# EAGLE board PCB_2D_Final (EAGLE 9.7.0)
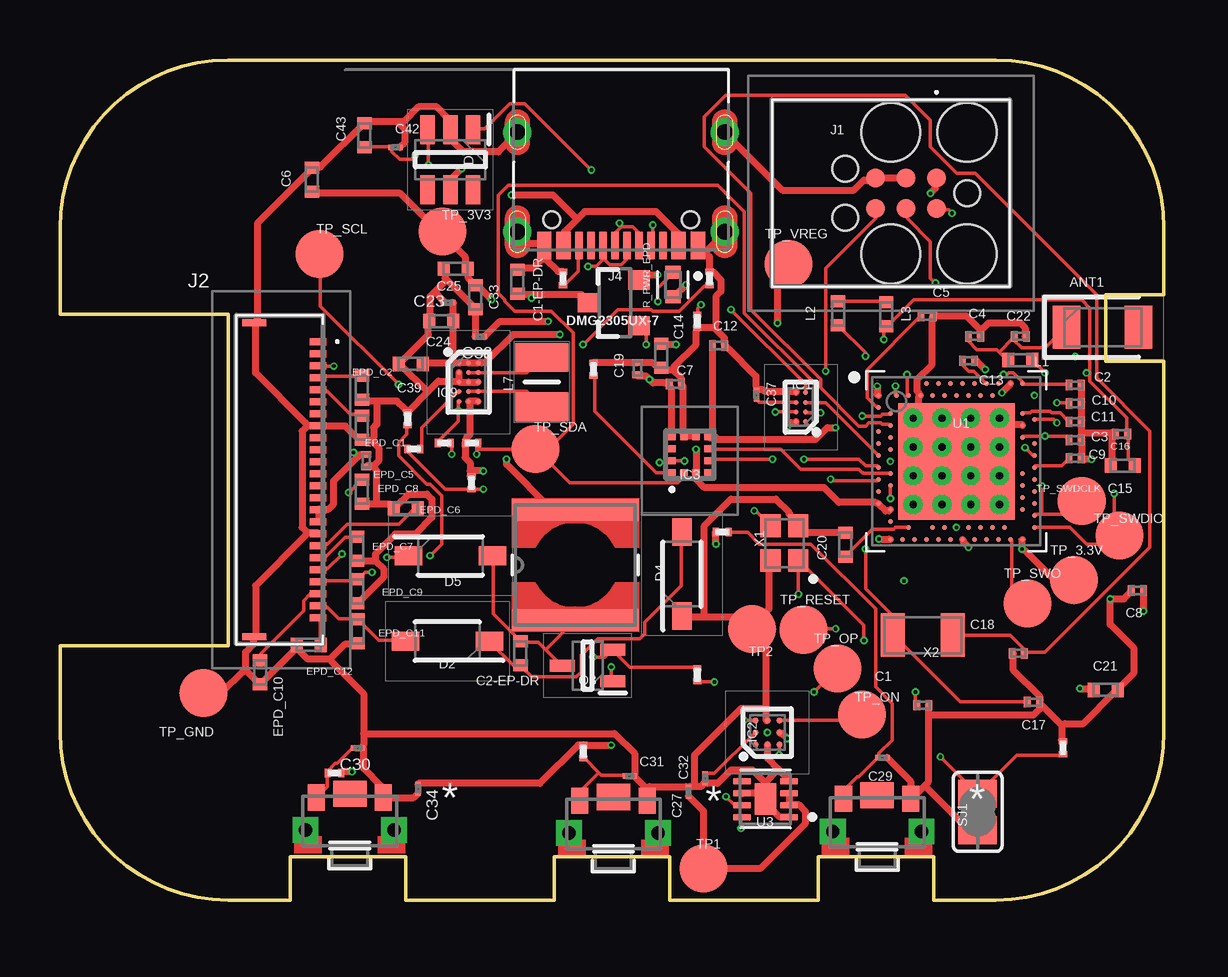
[diagram p0: board, top side]
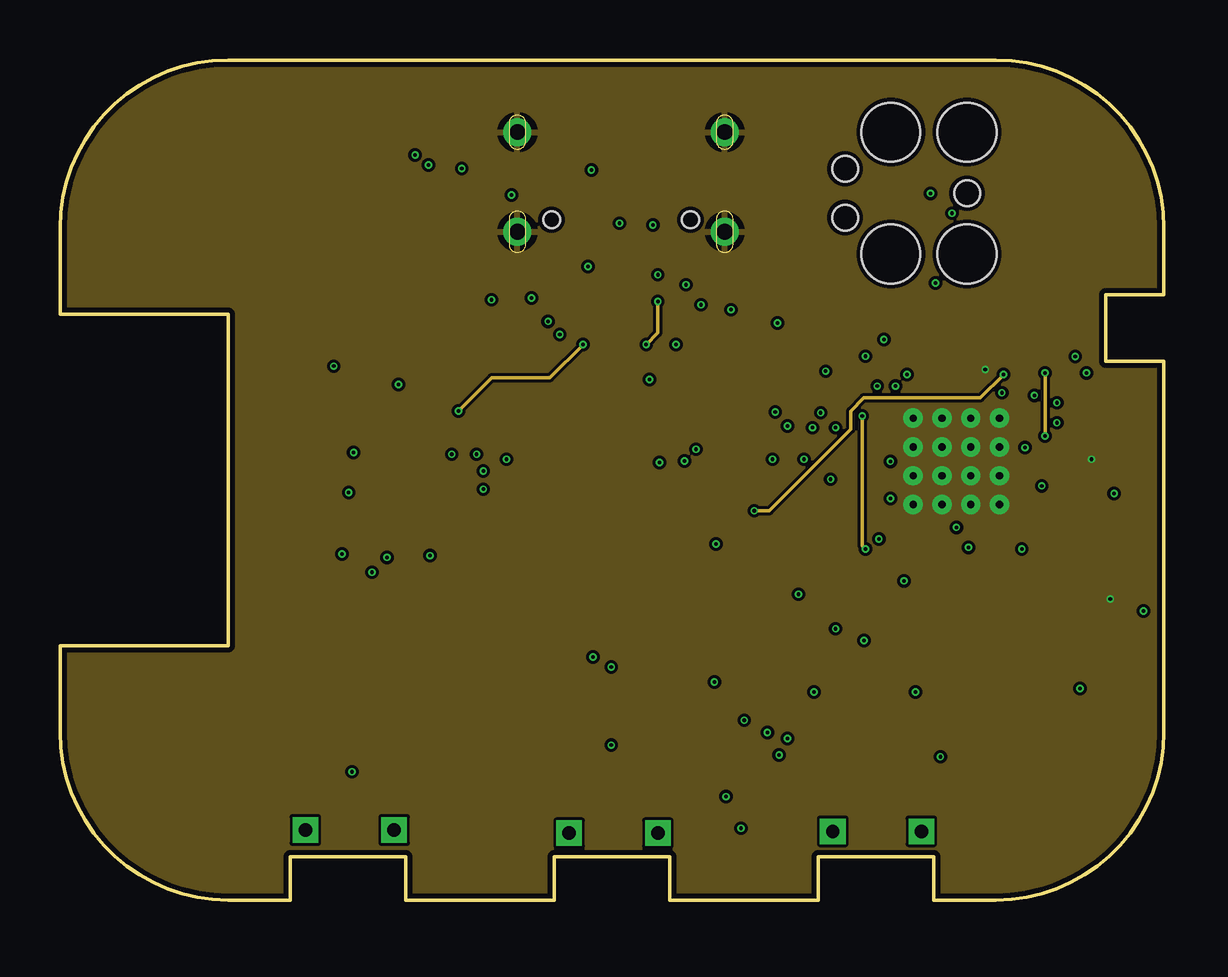
[diagram p1: board, inner layer Route2]
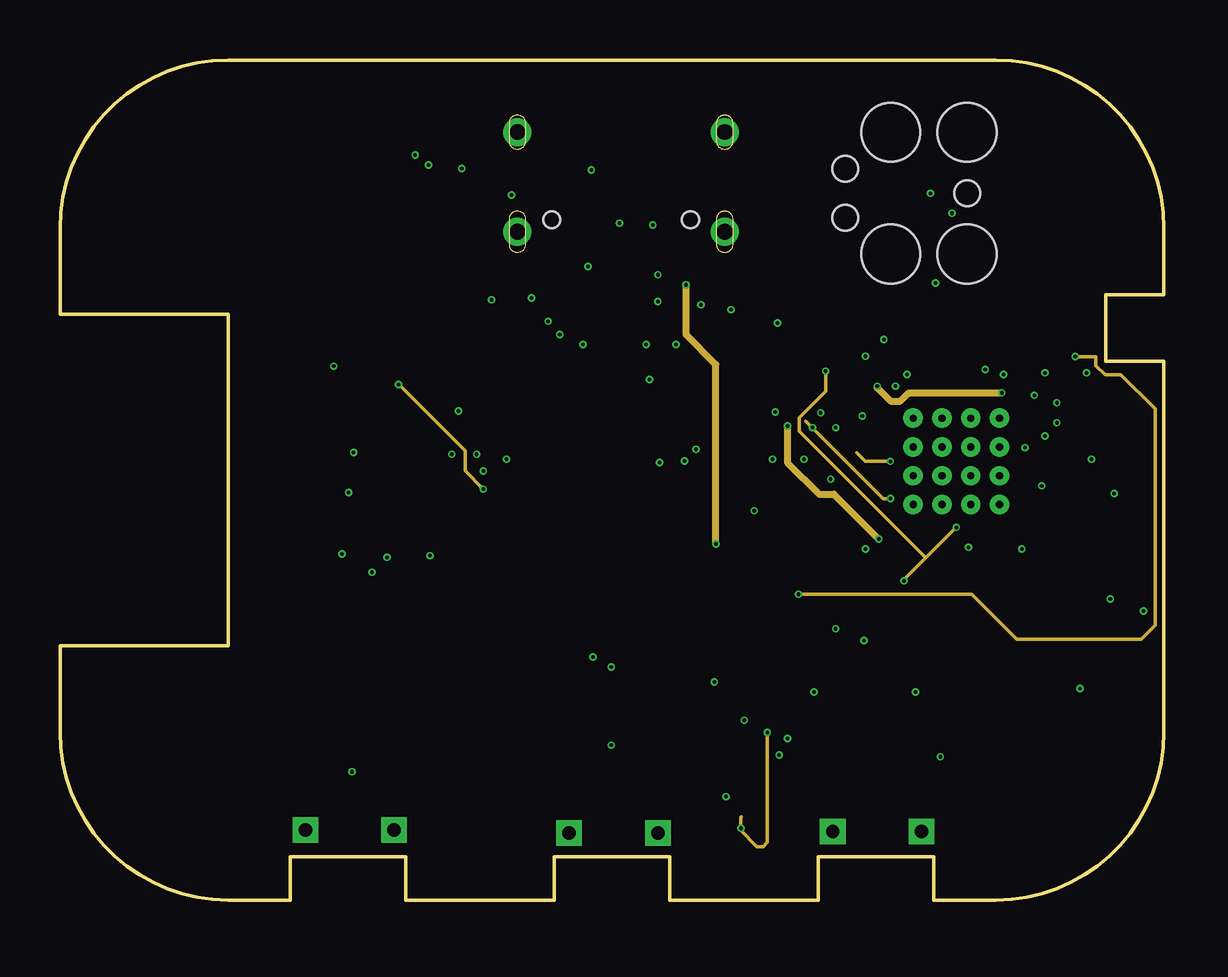
[diagram p2: board, inner layer Route15]
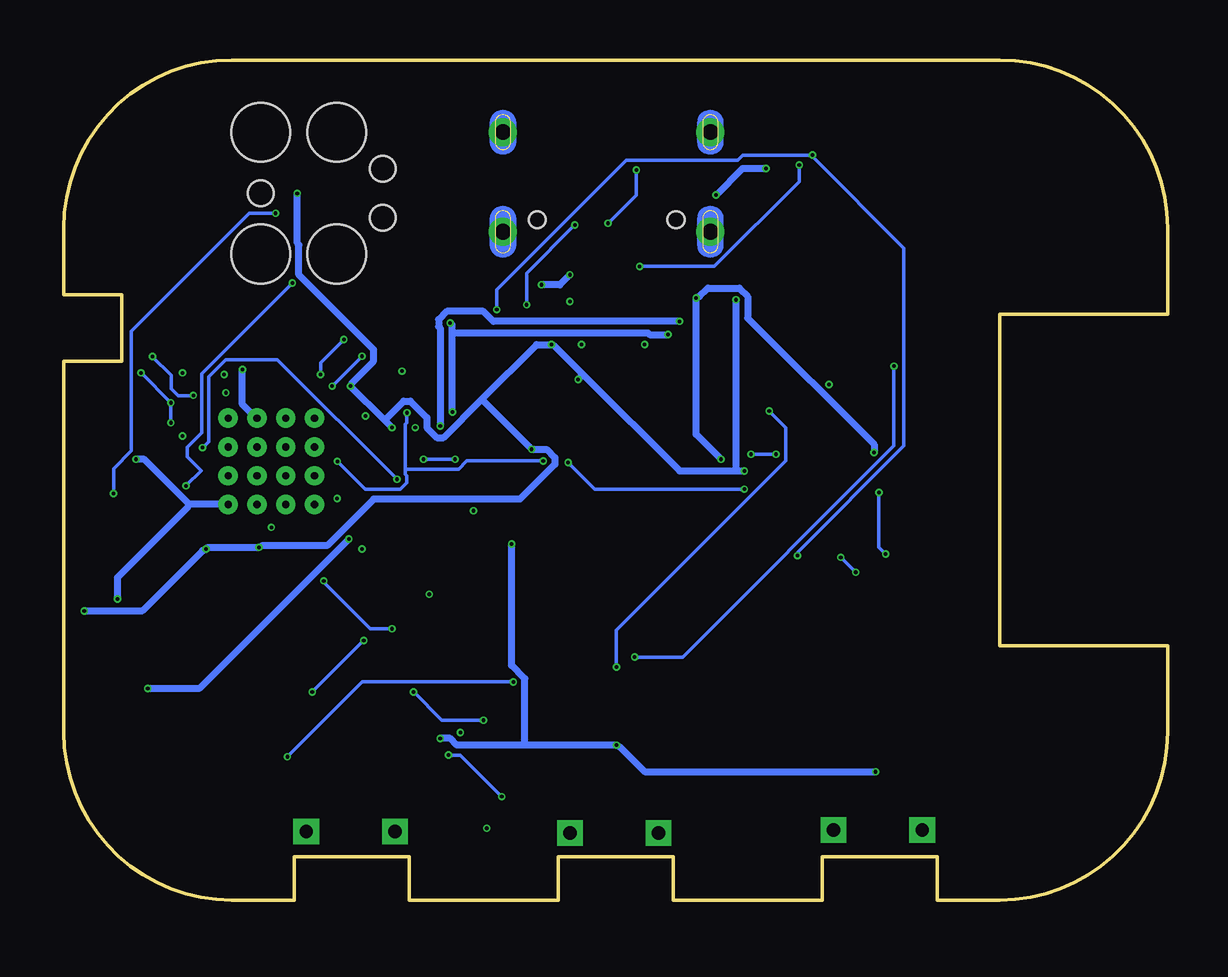
[diagram p3: board, bottom side, seen from below]

Size 46 x 35 mm. Coordinates in mm from the lower left corner, seen from the top.
Outline: 39,0 36.4,0 36.4,1.8 31.6,1.8 31.6,0 25.4,0 25.4,1.8 20.6,1.8 20.6,0 14.4,0 14.4,1.8 9.6,1.8 9.6,0 7,0 arc-90 0,7 0,10.6 7,10.6 7,24.4 0,24.4 0,28 arc-90 7,35 39,35 arc-90 46,28 46,25.23 43.57,25.23 43.57,22.45 46,22.45 46,7 arc-90 39,0
Copper layers (1+2*15+16): Top 0.035mm / dielectric 1.6mm / Route2 0.035mm / dielectric 0.15mm / Route15 0.035mm / dielectric 0.2mm / Bottom 0.035mm
Design rules "jlcpcb-2layers.dru *": minimum track width 0.15mm, minimum drill 0.15mm, track to track 5mil, track to pad 5mil, pad to pad 5mil, via to via 5mil, smd to smd 5mil, copper to edge 0.2mm, drill to drill 6mil, minimum pad ring 10mil, minimum via ring 3mil, stop-mask expansion 4mil, vias tented up to drill 0mil, thermal gap 10mil
Net classes: 1 power: width 0.3 mm

## Footprints (pad centres in the part's own frame; a part is rotated, then mirrored left to right if it is on the bottom)
2450AT18B100E_ANTC3216X140N = smd 1.15 x 1.8: 1 -1.5,0; 2 1.5,0
NORDIC_NRF_3_RESC0201_L = smd 0.28 x 0.43: 1 -0.255,0; 2 0.255,0
NORDIC_NRF_3_RESC0402_L = smd 0.5 x 0.6: 1 -0.5,0; 2 0.5,0
GRM011R60J152KE01L_2_CAPC0201X13N = smd 0.22 x 0.23: 1 -0.185,0; 2 0.185,0
ESP32_C6_LIBRARY_3_SOT95P280X145-6N = smd 1.2 x 0.6: 1 -1.25,0.95; 2 -1.25,0; 3 -1.25,-0.95; 4 1.25,-0.95; 5 1.25,0; 6 1.25,0.95
ESP32_C6_LIBRARY_5_SOD3716X135N = smd 1.15 x 0.8: 1 -1.75,0; 2 1.75,0
ESP32_C6_LIBRARY_4_ESP32_C6_LIBRARY_4_ESP32_C6_LIBRARY_4_ESP32_C6_LIBRARY_4_ESP32_WROVER_SPARKFUN-DISCRETESEMI_SOT23-3 = smd 0.8 x 0.9: 1 -0.95,-1; 2 0.95,-1; 3 0,1.1
BQ25180YBGR_BGA8C40P2X4_100X155X50 = smd 0.2 x 0.2: A1 -0.2,0.6; A2 0.2,0.6; B1 -0.2,0.2; B2 0.2,0.2; C1 -0.2,-0.2; C2 0.2,-0.2; D1 -0.2,-0.6; D2 0.2,-0.6
DRV2605YZFR_BGA9C50P3X3_144X144X62 = smd 0.25 x 0.25: A1 -0.5,0.5; A2 0,0.5; A3 0.5,0.5; B1 -0.5,0; B2 0,0; B3 0.5,0; C1 -0.5,-0.5; C2 0,-0.5; C3 0.5,-0.5
BMA423_BMA423 = smd 0.3 x 0.35: 1 -0.75,-0.775; 2 -0.25,-0.775; 3 0.25,-0.775; 4 0.75,-0.775; 7 0.75,0.775; 8 0.25,0.775; 9 -0.25,0.775; 10 -0.75,0.775 | smd 0.35 x 0.3: 5 0.775,-0.25; 6 0.775,0.25; 11 -0.775,0.25; 12 -0.775,-0.25
RT6160AWSC_BGA15C40P3X5_140X230X60 = smd 0.216 x 0.216: A1 -0.4,0.8; A2 0,0.8; A3 0.4,0.8; B1 -0.4,0.4; B2 0,0.4; B3 0.4,0.4; C1 -0.4,0; C2 0,0; C3 0.4,0; D1 -0.4,-0.4; D2 0,-0.4; D3 0.4,-0.4; E1 -0.4,-0.8; E2 0,-0.8; E3 0.4,-0.8
TC2030-IDC_TC2030IDC = smd 0.783 x 0.783: 1 -0.953,-0.635; 2 -0.953,0.635; 3 0.317,-0.635; 4 0.317,0.635; 5 1.588,-0.635; 6 1.588,0.635 | hole 2.451: -2.223,-2.54; -2.223,2.54; 0.952,-2.54; 0.952,2.54 | hole 1.067: -2.223,0; 2.857,-1.016; 2.857,1.016
503480-2400_5034802400 = smd 0.3 x 0.7: 1 -5.75,1.525; 2 -5.25,1.525; 3 -4.75,1.525; 4 -4.25,1.525; 5 -3.75,1.525; 6 -3.25,1.525; 7 -2.75,1.525; 8 -2.25,1.525; 9 -1.75,1.525; 10 -1.25,1.525; 11 -0.75,1.525; 12 -0.25,1.525; 13 0.25,1.525; 14 0.75,1.525; 15 1.25,1.525; 16 1.75,1.525; 17 2.25,1.525; 18 2.75,1.525; 19 3.25,1.525; 20 3.75,1.525; 21 4.25,1.525; 22 4.75,1.525; 23 5.25,1.525; 24 5.75,1.525 | smd 0.3 x 1: MP1 -6.54,-1.125; MP2 6.54,-1.125
KH-TYPE-C-16P_KINGHELM_KH-TYPE-C-16P = smd 0.6 x 1.15: A1_B12 -3.2,4.725; A4_B9 -2.4,4.725; A9_B4 2.4,4.725; A12_B1 3.2,4.725 | smd 0.3 x 1.15: A5 -1.25,4.725; A6 -0.25,4.725; A7 0.25,4.725; A8 1.25,4.725; B5 1.75,4.725; B6 0.75,4.725; B7 -0.75,4.725; B8 -1.75,4.725 | drill 0.65 pad 1.05: SH1 -4.32,0; SH2 4.32,0; SH3 -4.32,4.15; SH4 4.32,4.15 | hole 0.7: -2.89,3.65; 2.89,3.65
NORDIC_NRF_2_RESC0402_L = smd 0.5 x 0.6: 1 -0.5,0; 2 0.5,0
ESP32_C6_LIBRARY_2_IND_4828-WE-TPC_WRE = smd 0.9 x 5.3: 1 -2.286,0; 2 2.286,0
MLP2016SR47MT0S1_INDC2016X100N = smd 1.2 x 2.2: 1 -1.028,0; 2 1.028,0
ESP32_C6_LIBRARY_6_SOT65P210X110-3N = smd 1.05 x 0.5: 1 -1.05,0.65; 2 -1.05,-0.65; 3 1.05,0
CPF0201D7K68C1_0201 = smd 0.35 x 0.25: 1 0,0.275; 2 0,-0.275
RESC1005X40 = smd 0.535 x 0.644: 1 -0.507,0; 2 0.507,0
ESP32_C6_LIBRARY_7_JUMPER_SJ = smd 1.168 x 1.6: 1 -0.762,0; 2 0.762,0
2025-10-22_07-23-44_LIBRARY_SW_EVP-AKE31A_PAN = smd 0.711 x 1.092: 1 -1.4,-0.972; 2 1.4,-0.972 | drill 0.559 pad 0.914 square: 3 -1.848,0.381; 4 1.848,0.381 | smd 1.397 x 1.092: 5 0,-1.124
HECTOR_WATCH_1_TP20R = smd 2 x 2: TP 0,0
NORDIC_NRF_4_AQFN50P700X700X85_HS-74N = smd 4.85 x 4.85: P$74 0,0 | drill 0.3 pad 0.6: P$75 -1.8,1.8; P$76 -0.6,1.8; P$77 0.6,1.8; P$78 1.8,1.8; P$79 -1.8,0.6; P$80 -0.6,0.6; P$81 0.6,0.6; P$82 1.8,0.6; P$83 -1.8,-0.6; P$84 -0.6,-0.6; P$85 0.6,-0.6; P$86 1.8,-0.6; P$87 -1.8,-1.8; P$88 -0.6,-1.8; P$89 0.6,-1.8; P$90 1.8,-1.8 | smd 0.2 x 0.2: P$A8 -1.25,3.25; P$A10 -0.75,3.25; P$A12 -0.25,3.25; P$A14 0.25,3.25; P$A16 0.75,3.25; P$A18 1.25,3.25; P$A20 1.75,3.25; P$A22 2.25,3.25; P$A23 2.75,3.25; P$AA24 3.25,-2.25; P$AB2 -2.75,-2.5; P$AC5 -2,-2.75; P$AC9 -1,-2.75; P$AC11 -0.5,-2.75; P$AC13 0,-2.75; P$AC15 0.5,-2.75; P$AC17 1,-2.75; P$AC19 1.5,-2.75; P$AC21 2,-2.75; P$AC24 3.25,-2.75; P$AD2 -2.75,-3.25; P$AD4 -2.25,-3.25; P$AD6 -1.75,-3.25; P$AD8 -1.25,-3.25; P$AD10 -0.75,-3.25; P$AD12 -0.25,-3.25; P$AD14 0.25,-3.25; P$AD16 0.75,-3.25; P$AD18 1.25,-3.25; P$AD20 1.75,-3.25; P$AD22 2.25,-3.25; P$AD23 2.75,-3.25; P$B1 -3.25,2.75; P$B3 -2.5,2.75; P$B5 -2,2.75; P$B7 -1.5,2.75; P$B9 -1,2.75; P$B11 -0.5,2.75; P$B13 0,2.75; P$B15 0.5,2.75; P$B17 1,2.75; P$B19 1.5,2.75; P$B24 3.25,2.75; P$C1 -3.25,2.25; P$D2 -2.75,2; P$D23 2.75,2; P$E24 3.25,1.75; P$F2 -2.75,1.5; P$F23 2.75,1.5; P$G1 -3.25,1.25; P$H2 -2.75,1; P$H23 2.75,1; P$J1 -3.25,0.75; P$J24 3.25,0.75; P$K2 -2.75,0.5; P$L1 -3.25,0.25; P$L24 3.25,0.25; P$M2 -2.75,0; P$N1 -3.25,-0.25; P$N24 3.25,-0.25; P$P2 -2.75,-0.5; P$P23 2.75,-0.5; P$R1 -3.25,-0.75; P$R24 3.25,-0.75; P$T2 -2.75,-1; P$T23 2.75,-1; P$U1 -3.25,-1.25; P$U24 3.25,-1.25; P$V23 2.75,-1.5; P$W1 -3.25,-1.75; P$W24 3.25,-1.75; P$Y2 -2.75,-2; P$Y23 2.75,-2
ESP32_C6_LIBRARY_SON50P200X200X80-9N = smd 0.76 x 0.27: 1 -0.985,0.75; 2 -0.985,0.25; 3 -0.985,-0.25; 4 -0.985,-0.75; 5 0.985,-0.75; 6 0.985,-0.25; 7 0.985,0.25; 8 0.985,0.75 | smd 0.9 x 1.3: 9 0,0
NORDIC_NRF_BT-XTAL_2016_N = smd 0.95 x 0.85: 1 -0.725,-0.575; 2 0.725,-0.575; 3 0.725,0.575; 4 -0.725,0.575
NORDIC_NRF_1_XTAL_3215_N = smd 1 x 1.8: 1 -1.25,0; 2 1.25,0

## Placement (x,y rotation side)
ANT1  2450AT18B100E  [2450AT18B100E_ANTC3216X140N]  43.44,23.86 0 top
C1  12pF  [NORDIC_NRF_3_RESC0201_L]  35.95,8.12 0 top
C1-EP-DR  10uF  [NORDIC_NRF_3_RESC0402_L]  19.06,25.77 90 top
C2  12pF  [NORDIC_NRF_3_RESC0201_L]  42.3,21.45 0 top
C2-EP-DR  4.7uF/25V  [NORDIC_NRF_3_RESC0402_L]  19.19,10.28 90 top
C3  1pF  [NORDIC_NRF_3_RESC0201_L]  42.3,19.17 0 top
C4  1pF  [NORDIC_NRF_3_RESC0201_L]  38.11,23.48 0 top
C5  100nF  [NORDIC_NRF_3_RESC0201_L]  36.13,24.32 0 top
C6  4.7μF  [NORDIC_NRF_3_RESC0402_L]  10.5,30.01 90 top
C7  100nF  [NORDIC_NRF_3_RESC0201_L]  25.64,21.5 0 top
C8  100nF  [NORDIC_NRF_3_RESC0201_L]  44.89,12.89 180 top
C9  820pF  [NORDIC_NRF_3_RESC0201_L]  42.3,18.4 0 top
C10  N.C  [NORDIC_NRF_3_RESC0201_L]  42.3,20.69 0 top
C11  100pF  [NORDIC_NRF_3_RESC0201_L]  42.3,19.93 0 top
C12  100nF  [NORDIC_NRF_3_RESC0201_L]  27.44,23.1 0 top
C13  N.C  [NORDIC_NRF_3_RESC0201_L]  37.85,22.47 0 top
C14  4.7μF  [NORDIC_NRF_3_RESC0402_L]  25.05,22.67 270 top
C15  1.0μF  [NORDIC_NRF_3_RESC0402_L]  44.28,18.1 180 top
C16  47nF  [NORDIC_NRF_3_RESC0201_L]  44.23,19.42 180 top
C17  12pF  [NORDIC_NRF_3_RESC0201_L]  40.56,8.24 180 top
C18  12pF  [NORDIC_NRF_3_RESC0201_L]  39.93,10.28 0 top
C19  100nF  [NORDIC_NRF_3_RESC0201_L]  24.06,22.14 90 top
C20  4.7μF  [NORDIC_NRF_3_RESC0402_L]  32.72,14.8 90 top
C21  4.7μF  [NORDIC_NRF_3_RESC0402_L]  43.57,8.75 0 top
C22  N.C  [NORDIC_NRF_3_RESC0201_L]  40.01,23.48 0 top
C23  0.1uF  [GRM011R60J152KE01L_2_CAPC0201X13N]  16.16,24.9 180 top
C24  10uF  [NORDIC_NRF_3_RESC0402_L]  15.88,24.12 0 top
C25  22uF  [NORDIC_NRF_3_RESC0402_L]  16.49,26.3 180 top
C27  0.1uF  [GRM011R60J152KE01L_2_CAPC0201X13N]  26.2,4.51 270 top
C29  1uF  [GRM011R60J152KE01L_2_CAPC0201X13N]  34.27,5.93 180 top
C30  1uF  [GRM011R60J152KE01L_2_CAPC0201X13N]  12.4,6.34 180 top
C31  1uF  [GRM011R60J152KE01L_2_CAPC0201X13N]  23.73,5.17 180 top
C32  1uF  [GRM011R60J152KE01L_2_CAPC0201X13N]  26.88,5.07 90 top
C33  22uF  [NORDIC_NRF_3_RESC0402_L]  17.31,25.11 270 top
C34  0.1uF  [GRM011R60J152KE01L_2_CAPC0201X13N]  14.92,4.64 90 top
C37  1uF  [GRM011R60J152KE01L_2_CAPC0201X13N]  29.02,21.05 270 top
C38  1uF  [GRM011R60J152KE01L_2_CAPC0201X13N]  17.48,23.48 180 top
C39  10uF  [NORDIC_NRF_3_RESC0402_L]  14.61,22.34 180 top
C42  0.1uF  [GRM011R60J152KE01L_2_CAPC0201X13N]  13.98,31.36 0 top
C43  4.7uF  [NORDIC_NRF_3_RESC0402_L]  12.68,31.87 90 top
D1  USBLC6-2SC6Y  [ESP32_C6_LIBRARY_3_SOT95P280X145-6N]  16.26,30.85 270 top
D2  MBR0530  [ESP32_C6_LIBRARY_5_SOD3716X135N]  16.14,10.78 180 top
D4  MBR0530  [ESP32_C6_LIBRARY_5_SOD3716X135N]  25.92,13.58 90 top
D5  MBR0530  [ESP32_C6_LIBRARY_5_SOD3716X135N]  16.26,14.34 0 top
DMG2305UX-7  20V/4.2A/52mΩ/1.4W  [ESP32_C6_LIBRARY_4_ESP32_C6_LIBRARY_4_ESP32_C6_LIBRARY_4_ESP32_C6_LIBRARY_4_ESP32_WROVER_SPARKFUN-DISCRETESEMI_SOT23-3]  23.12,24.88 90 top
EPD_C1  1uF/50V  [NORDIC_NRF_3_RESC0402_L]  12.58,19.67 90 top
EPD_C2  1uF/50V  [NORDIC_NRF_3_RESC0402_L]  12.58,21.35 90 top
EPD_C5  0.1uF/50V  [NORDIC_NRF_3_RESC0201_L]  12.76,18.3 90 top
EPD_C6  1uF/50V  [NORDIC_NRF_3_RESC0402_L]  14.41,16.32 0 top
EPD_C7  1uF/50V  [NORDIC_NRF_3_RESC0402_L]  12.38,14.64 90 top
EPD_C8  1uF/50V  [NORDIC_NRF_3_RESC0402_L]  12.58,17.01 90 top
EPD_C9  1uF/50V  [NORDIC_NRF_3_RESC0402_L]  12.38,12.87 90 top
EPD_C10  1uF/50V  [NORDIC_NRF_3_RESC0402_L]  8.34,9.49 90 top
EPD_C11  1uF/50V  [NORDIC_NRF_3_RESC0402_L]  12.4,11.19 90 top
EPD_C12  1uF/50V  [NORDIC_NRF_3_RESC0402_L]  10.37,10.63 0 top
IC1  BQ25180YBGR  [BQ25180YBGR_BGA8C40P2X4_100X155X50]  30.87,20.54 180 top
IC2  DRV2605YZFR  [DRV2605YZFR_BGA9C50P3X3_144X144X62]  29.47,6.97 90 top
IC3  BMA421  [BMA423_BMA423]  26.25,18.56 0 top
IC9  RT6160AWSC  [RT6160AWSC_BGA15C40P3X5_140X230X60]  17.03,21.58 0 top
J1  TC2030-IDC  [TC2030-IDC_TC2030IDC]  35.57,29.45 180 top
J2  503480-2400  [503480-2400_5034802400]  9.23,17.52 270 top
J4  KH-TYPE-C-16P  [KH-TYPE-C-16P_KINGHELM_KH-TYPE-C-16P]  23.38,31.99 180 top
L1  3.9nH  [NORDIC_NRF_2_RESC0402_L]  40.01,22.49 180 top
L2  10μH  [NORDIC_NRF_2_RESC0402_L]  32.42,24.45 90 top
L3  15nH  [NORDIC_NRF_2_RESC0402_L]  34.43,24.4 270 top
L5  68uH  [ESP32_C6_LIBRARY_2_IND_4828-WE-TPC_WRE]  21.47,13.96 90 top
L7  FTC252012SR47MBCA  [MLP2016SR47MT0S1_INDC2016X100N]  20.07,21.58 270 top
Q3  SI1308EDL-T1-GE3  [ESP32_C6_LIBRARY_6_SOT65P210X110-3N]  21.98,9.77 180 top
R1_EP_DR  0.47  [CPF0201D7K68C1_0201]  26.55,9.39 180 top
R1_USB  5K1  [CPF0201D7K68C1_0201]  26.55,24.12 180 top
R2  0  [CPF0201D7K68C1_0201]  16.01,19.04 270 top
R2_EP_DR  10K  [CPF0201D7K68C1_0201]  27.06,25.9 0 top
R2_USB  5K1  [CPF0201D7K68C1_0201]  20.96,25.9 180 top
R3  0  [CPF0201D7K68C1_0201]  22.23,22.11 0 top
R4  0  [CPF0201D7K68C1_0201]  14.74,18.78 90 top
R5  10K  [CPF0201D7K68C1_0201]  11.44,5.3 90 top
R7  10K  [CPF0201D7K68C1_0201]  27.59,15.33 270 top
R8  10K  [CPF0201D7K68C1_0201]  21.8,6.19 180 top
R9  10K  [CPF0201D7K68C1_0201]  14.49,20.05 0 top
R17  3K3  [CPF0201D7K68C1_0201]  17.15,17.39 0 top
R18  3K3  [CPF0201D7K68C1_0201]  17.15,19.04 90 top
R_PWR_EPD  10K  [RESC1005X40]  25.54,25.64 270 top
R_TYPE_SEL  2.2  [CPF0201D7K68C1_0201]  41.79,6.34 0 top
SJ1  [ESP32_C6_LIBRARY_7_JUMPER_SJ]  38.24,3.67 90 top
SW_DN  2025-10-22_07-23-44_LIBRARY_EVP-AKE31ASW_EVP-AKE31A_PAN  [2025-10-22_07-23-44_LIBRARY_SW_EVP-AKE31A_PAN]  34.04,3.24 180 top
SW_ENT  2025-10-22_07-23-44_LIBRARY_EVP-AKE31ASW_EVP-AKE31A_PAN  [2025-10-22_07-23-44_LIBRARY_SW_EVP-AKE31A_PAN]  23.06,3.17 180 top
SW_UP  2025-10-22_07-23-44_LIBRARY_EVP-AKE31ASW_EVP-AKE31A_PAN  [2025-10-22_07-23-44_LIBRARY_SW_EVP-AKE31A_PAN]  12.07,3.3 180 top
TP1  HECTOR_WATCH_1_TPTP20R  [HECTOR_WATCH_1_TP20R]  26.81,1.31 0 top
TP2  HECTOR_WATCH_1_TPTP20R  [HECTOR_WATCH_1_TP20R]  28.84,11.29 0 top
TP_3.3V  HECTOR_WATCH_1_TPTP20R  [HECTOR_WATCH_1_TP20R]  42.25,13.32 0 top
TP_3V3  HECTOR_WATCH_1_TPTP20R  [HECTOR_WATCH_1_TP20R]  15.93,27.85 0 top
TP_GND  HECTOR_WATCH_1_TPTP20R  [HECTOR_WATCH_1_TP20R]  5.98,8.62 0 top
TP_ON  HECTOR_WATCH_1_TPTP20R  [HECTOR_WATCH_1_TP20R]  33.41,7.74 0 top
TP_OP  TP_OP  [HECTOR_WATCH_1_TP20R]  32.39,9.64 0 top
TP_RESET  HECTOR_WATCH_1_TPTP20R  [HECTOR_WATCH_1_TP20R]  30.99,11.26 0 top
TP_SCL  HECTOR_WATCH_1_TPTP20R  [HECTOR_WATCH_1_TP20R]  10.8,26.91 0 top
TP_SDA  HECTOR_WATCH_1_TPTP20R  [HECTOR_WATCH_1_TP20R]  19.82,18.78 0 top
TP_SWDCLK  HECTOR_WATCH_1_TPTP20R  [HECTOR_WATCH_1_TP20R]  42.57,16.63 0 top
TP_SWDIO  HECTOR_WATCH_1_TPTP20R  [HECTOR_WATCH_1_TP20R]  44.15,15.18 0 top
TP_SWO  HECTOR_WATCH_1_TPTP20R  [HECTOR_WATCH_1_TP20R]  40.32,12.36 0 top
TP_VREG  HECTOR_WATCH_1_TPTP20R  [HECTOR_WATCH_1_TP20R]  30.36,26.51 0 top
U1  NRF52840_QF  [NORDIC_NRF_4_AQFN50P700X700X85_HS-74N]  37.35,18.28 0 top
U3  MAX17048G+T10  [ESP32_C6_LIBRARY_SON50P200X200X80-9N]  29.4,4.21 180 top
X1  32MHz  [NORDIC_NRF_BT-XTAL_2016_N]  30.18,14.87 90 top
X2  32.768kHz  [NORDIC_NRF_1_XTAL_3215_N]  35.95,11.04 180 top

## Library data of the parts
ANT1 = InkTime_v5; ARROW_PART_NUMBER: 2450AT18B100E; ARROW_PRICE-STOCK: https://www.arrow.com/en/products/2450at18b100e/johanson-dielectrics?utm_currency=USD&region=nac; DESCRIPTION: Antennas 2.45GHz ANTENNA; HEIGHT: 1.4mm; MANUFACTURER_NAME: JOHANSON TECHNOLOGY; MANUFACTURER_PART_NUMBER: 2450AT18B100E; MOUSER_PART_NUMBER: 609-2450AT18B100E; MOUSER_PRICE-STOCK: https://www.mouser.co.uk/ProductDetail/Johanson-Technology/2450AT18B100E?qs=yCnrNFeXz%252Bh5MFsFIXGZGA%3D%3D
C1 C1-EP-DR C2 C2-EP-DR C3-C22 C24 C25 C33 C39 C43 EPD_C1 EPD_C2 EPD_C5-EPD_C12 L1-L3 R1_EP_DR R1_USB R2 R2_EP_DR R2_USB R3-R5 R7-R9 R17 R18 R_TYPE_SEL SJ1 TP1 TP2 TP_3.3V TP_3V3 TP_GND TP_ON TP_OP TP_RESET TP_SCL TP_SDA TP_SWDCLK TP_SWDIO TP_SWO TP_VREG U1 X1 X2 = InkTime_v5
C23 C27 C29-C32 C34 C37 C38 C42 = InkTime_v5; AVAILABILITY: In Stock; CHECK_PRICES: https://www.snapeda.com/parts/GRM011R60J152KE01L/Murata/view-part/?ref=eda; DESCRIPTION: SMD Capacitor X5R(EIA) with Capacitance: 1500pF Tol. 10%. Rated Voltage: 6.3Vdc; MF: Murata; MP: GRM011R60J152KE01L; PACKAGE: 0201 Murata; PRICE: None; SNAPEDA_LINK: https://www.snapeda.com/parts/GRM011R60J152KE01L/Murata/view-part/?ref=snap
D1 = InkTime_v5; AVAILABILITY: In Stock; CHECK_PRICES: https://www.snapeda.com/parts/USBLC6-2SC6Y/STMicroelectronics/view-part/?ref=eda; DESCRIPTION: 17V Clamp 5A (8/20µs) Ipp Tvs Diode Surface Mount SOT-23-6; MF: STMicroelectronics; MP: USBLC6-2SC6Y; PACKAGE: SOT-23-6 STMicroelectronics; PRICE: None; SNAPEDA_LINK: https://www.snapeda.com/parts/USBLC6-2SC6Y/STMicroelectronics/view-part/?ref=snap
D2 D4 D5 = InkTime_v5; AVAILABILITY: In Stock; CHECK_PRICES: https://www.snapeda.com/parts/MBR0530/Onsemi/view-part/?ref=eda; DESCRIPTION: Diode Schottky 30 V 500mA Surface Mount SOD-123; MF: ON Semiconductor; MP: MBR0530; PACKAGE: SOD-123-2 ON Semiconductor; PRICE: None; PURCHASE-URL: https://www.snapeda.com/api/url_track_click_mouser/?unipart_id=179458&manufacturer=ON Semiconductor&part_name=MBR0530&search_term=None; SNAPEDA_LINK: https://www.snapeda.com/parts/MBR0530/Onsemi/view-part/?ref=snap
DMG2305UX-7 = InkTime_v5; PROD_ID: TRAN-14388
IC1 = InkTime_v5; ARROW_PART_NUMBER: BQ25180YBGR; ARROW_PRICE-STOCK: https://www.arrow.com/en/products/bq25180ybgr/texas-instruments?utm_currency=USD&region=nac; DESCRIPTION: Charger IC Lithium Ion/Polymer, Lithium Iron Phosphate 8-DSBGA (1.6x1.1); HEIGHT: 0.5mm; MANUFACTURER_NAME: Texas Instruments; MANUFACTURER_PART_NUMBER: BQ25180YBGR; MOUSER_PART_NUMBER: 595-BQ25180YBGR; MOUSER_PRICE-STOCK: https://www.mouser.co.uk/ProductDetail/Texas-Instruments/BQ25180YBGR?qs=doiCPypUmgEWjAK%252BJAX6Tw%3D%3D
IC2 = InkTime_v5; ARROW_PART_NUMBER: DRV2605YZFR; ARROW_PRICE-STOCK: https://www.arrow.com/en/products/drv2605yzfr/texas-instruments?region=nac; DESCRIPTION: Haptic Driver for ERM/LRA with Built-In Library and Smart Loop Architecture; HEIGHT: 0.625mm; MANUFACTURER_NAME: Texas Instruments; MANUFACTURER_PART_NUMBER: DRV2605YZFR
IC3 = InkTime_v5; ARROW_PART_NUMBER: BMA423; ARROW_PRICE-STOCK: https://www.arrow.com/en/products/bma423/bosch; DESCRIPTION: Accelerometers Triaxial low-g 12bit Acceleration Sensor; HEIGHT: 1mm; MANUFACTURER_NAME: BOSCH; MANUFACTURER_PART_NUMBER: BMA423; MOUSER_PART_NUMBER: 262-BMA423; MOUSER_PRICE-STOCK: https://www.mouser.co.uk/ProductDetail/Bosch-Sensortec/BMA423?qs=HXFqYaX1Q2xC%252BSgeGoX3mg%3D%3D
IC9 = InkTime_v5; DESCRIPTION: Buck-Boost Regulator Positive Output Step-Up/Step-Down I2C DC-DC Controller IC 15-WL-CSP (BSC) (1.4x2.3); HEIGHT: 0.6mm; MANUFACTURER_NAME: RICHTEK; MANUFACTURER_PART_NUMBER: RT6160AWSC; MOUSER_PART_NUMBER: 835-RT6160AWSC; MOUSER_PRICE-STOCK: https://www.mouser.co.uk/ProductDetail/Richtek/RT6160AWSC?qs=amGC7iS6iy%2FLd9PSoixZXQ%3D%3D
J1 = InkTime_v5; DESCRIPTION: CABLE ADAPTER 6 POS; HEIGHT: 19mm; MANUFACTURER_NAME: Tag Connect; MANUFACTURER_PART_NUMBER: TC2030-IDC
J2 = InkTime_v5; DESCRIPTION: FFC & FPC Connectors 0.5mm FPC RA SMT Dual Contact 24Ckt; HEIGHT: 1.87mm; MANUFACTURER_NAME: Molex; MANUFACTURER_PART_NUMBER: 503480-2400; MOUSER_PART_NUMBER: 538-503480-2400; MOUSER_PRICE-STOCK: https://www.mouser.co.uk/ProductDetail/Molex/503480-2400?qs=OAhjpuo3Vu7efIoxFh9AOw%3D%3D
J4 = InkTime_v5; AVAILABILITY: Not in stock; CHECK_PRICES: https://www.snapeda.com/parts/KH-TYPE-C-16P/Kinghelm/view-part/?ref=eda; MF: kinghelm; MP: KH-TYPE-C-16P; PACKAGE: None; PRICE: None; SNAPEDA_LINK: https://www.snapeda.com/parts/KH-TYPE-C-16P/Kinghelm/view-part/?ref=snap
L5 = InkTime_v5; COPYRIGHT: Copyright (C) 2024 Ultra Librarian. All rights reserved.; MANUFACTURER_PART_NUMBER: 744043680; MFR_NAME: Wurth Electronics
L7 = InkTime_v5; DESCRIPTION: SMD / SMT Inductors (Coils), L=0.47?H, L x W x T :; HEIGHT: 1mm; JLCPCB: https://jlcpcb.com/partdetail/6763488-FTC252012SR47MBCA/C5832368; MANUFACTURER_NAME: TDK; MANUFACTURER_PART_NUMBER: FTC252012SR47MBCA
Q3 = InkTime_v5; AVAILABILITY: In Stock; CHECK_PRICES: https://www.snapeda.com/parts/SI1308EDL-T1-GE3/Vishay+Siliconix/view-part/?ref=eda; DESCRIPTION: Si1308EDL-T1-GE3 N-channel MOSFET Transistor, 1.5 A, 30 V, 3-Pin SC-70 | Siliconix / Vishay SI1308EDL-T1-GE3; MF: Vishay Siliconix; MP: SI1308EDL-T1-GE3; PACKAGE: SOT-323 Vishay Semiconductor; PRICE: None; PURCHASE-URL: https://www.snapeda.com/api/url_track_click_mouser/?unipart_id=274603&manufacturer=Vishay Siliconix&part_name=SI1308EDL-T1-GE3&search_term=None; SNAPEDA_LINK: https://www.snapeda.com/parts/SI1308EDL-T1-GE3/Vishay+Siliconix/view-part/?ref=snap
R_PWR_EPD = Tinkercad; CATEGORY: Resistor; SUB-CATEGORY: Fixed
SW_DN SW_ENT SW_UP = InkTime_v5; COPYRIGHT: Copyright (C) 2025 Ultra Librarian. All rights reserved.; DIGI-KEY_PART_NUMBER_1: P123437TR-ND; DIGI-KEY_PART_NUMBER_2: P123437CT-ND; DIGI-KEY_PART_NUMBER_3: P123437DKR-ND; MANUFACTURER_NAME: Panasonic; MANUFACTURER_PART_NUMBER: EVP-AKE31A
U3 = InkTime_v5; AVAILABILITY: In Stock; CHECK_PRICES: https://www.snapeda.com/parts/MAX17048G+T10/Analog+Devices/view-part/?ref=eda; DESCRIPTION: 3µA 1-Cell/2-Cell Fuel Gauge with ModelGauge; MF: Analog Devices; MP: MAX17048G+T10; PACKAGE: TDFN-8 Maxim; PRICE: None; PURCHASE-URL: https://www.snapeda.com/api/url_track_click_mouser/?unipart_id=329239&manufacturer=Analog Devices&part_name=MAX17048G+T10&search_term=None; SNAPEDA_LINK: https://www.snapeda.com/parts/MAX17048G+T10/Analog+Devices/view-part/?ref=snap

## Nets
3V3/1.7D [power]: C34.2 DMG2305UX-7.2 IC2.C2 R5.2 R7.2 R8.2 R_PWR_EPD.2
3V3/2.4A [power]: C6.1 C7.1 C8.1 C12.1 C14.1 C19.1 C25.1 C33.1 IC3.3 IC3.7 IC3.10 IC9.E2 IC9.E3 J1.1 R17.1 R18.1 TP_3.3V.TP TP_3V3.TP U1.P$A22 U1.P$AD14 U1.P$AD23 U1.P$B1 U1.P$W1 U1.P$Y2
ALERT/1.6C: U3.5
ALERT/2.5C: U1.P$J24
D+/1.5D: D1.4
D+/2.7D: U1.P$AD6
D-/1.5D: D1.6
D-/2.7D: U1.P$AD4
DEC1: C5.1 U1.P$C1
DEC3: C11.1 U1.P$D23
DEC4_6: C10.1 C15.1 C16.1 L3.2 U1.P$B5 U1.P$E24
DN: D1.1 J4.A7 J4.B7
DP: D1.3 J4.A6 J4.B6
EPD_3V3 [power]: C1-EP-DR.1 DMG2305UX-7.3 EPD_C5.2 J2.15 J2.16 L5.2
EPD_BUSY/1.5D: J2.9
EPD_BUSY/2.2D: U1.P$AD12
EPD_CS/1.4C: J2.12
EPD_CS/2.2D: U1.P$K2
EPD_DC/1.5D: J2.11
EPD_DC/2.2D: U1.P$AD10
EPD_RST/1.5D: J2.10
EPD_RST/2.2D: U1.P$AC11
GDR: J2.2
GND [power]: C1-EP-DR.2 C1.2 C2.2 C3.2 C4.2 C5.2 C6.2 C7.2 C8.2 C9.2 C10.2 C11.2 C12.2 C13.2 C14.2 C15.2 C16.2 C17.1 C18.1 C19.2 C20.2 C21.2 C22.2 C23.2 C24.1 C25.2 C27.1 C29.1 C30.1 C31.1 C32.1 C33.2 C34.1 C37.1 C38.2 C39.2 C42.2 C43.2 D1.2 D4.1 EPD_C1.1 EPD_C2.1 EPD_C5.1 EPD_C6.1 EPD_C7.1 EPD_C8.1 EPD_C9.1 EPD_C10.1 EPD_C11.1 EPD_C12.1 IC1.D2 IC2.B1 IC2.B3 IC3.8 IC3.9 IC9.B1 IC9.C1 IC9.C2 IC9.C3 J1.3 J1.5 J2.8 J2.17 J2.MP1 J2.MP2 J4.A1_B12 J4.A12_B1 J4.SH1 J4.SH2 J4.SH3 J4.SH4 R1_USB.1 R2_EP_DR.1 R2_USB.2 R3.1 R9.1 R_TYPE_SEL.1 SJ1.1 SW_DN.1 SW_ENT.1 SW_UP.1 TP2.TP TP_GND.TP U1.P$74 U1.P$75 U1.P$76 U1.P$77 U1.P$78 U1.P$79 U1.P$80 U1.P$81 U1.P$82 U1.P$83 U1.P$84 U1.P$85 U1.P$86 U1.P$87 U1.P$88 U1.P$89 U1.P$90 U1.P$B7 U1.P$F23 U3.1 U3.4 U3.6 U3.9 X1.2 X1.4
HAPTIC_EN/1.4C: IC2.A1
HAPTIC_EN/2.6A: U1.P$U1
IMU_INT1: IC3.5 U1.P$N1
IMU_INT2: IC3.6 U1.P$P2
LX1: IC9.B2 IC9.B3 L7.1
LX2: IC9.D2 IC9.D3 L7.2
MOSI/1.5B: J2.14
MOSI/2.2D: U1.P$B13
N$1: IC9.D1 R4.2
N$2: IC3.1 R3.2
N$3: IC9.E1 Q3.1 R2.2 R2_EP_DR.2
N$4: C2-EP-DR.2 D5.2 L5.1 Q3.3
N$5: C42.1 C43.1 IC1.D1 R9.2
N$6: C2-EP-DR.1 D2.1 D4.2
N$7: R1_EP_DR.1 R_TYPE_SEL.2 SJ1.2
N$8: C32.2 IC2.A2
N$9: J4.A5 R1_USB.2
N$10: EPD_C2.2 J2.4
N$11: EPD_C1.2 J2.5
N$14: J4.B5 R2_USB.1
N$17: C20.1 U1.P$AC5
N$19: EPD_C6.2 J2.18
N$21: EPD_C7.2 J2.19
N$22: EPD_C8.2 J2.20
N$24: EPD_C10.2 J2.22
N$26: EPD_C12.2 J2.24
N$46: C9.1 U1.P$N24
N$49: C3.1 L1.1 U1.P$H23
N$51: C2.1 U1.P$A23 X1.3
N$52: C1.1 U1.P$B24 X1.1
N$58: C13.1 U1.P$A18
N$69: L2.1 U1.P$B3
N$70: L2.2 L3.1
OUT+: IC2.A3 TP_OP.TP
OUT-: IC2.C3 TP_ON.TP
P0.00/XL1: C17.2 U1.P$D2 X2.2
P0.01/XL2: C18.2 U1.P$F2 X2.1
P0.04: U1.P$J1
P0.13/1.5D: C30.2 R5.1 SW_UP.2
P0.13/2.6C: U1.P$AD8
P0.14/1.5D: C31.2 R8.1 SW_ENT.2
P0.14/2.7C: U1.P$AC9
P0.19: U1.P$AC15
P0.20: U1.P$AD16
P0.21: U1.P$AC17
P0.22: U1.P$AD18
P0.23: U1.P$AC19
P0.24: U1.P$AD20
P0.25: U1.P$AC21
P0.26: U1.P$G1
P0.27: U1.P$H2
P0.28: U1.P$B11
P0.29: U1.P$A10
P0.30: U1.P$B9
P0.31: U1.P$A8
P1.01/1.6C: DMG2305UX-7.1 R_PWR_EPD.1
P1.01/2.4B: U1.P$Y23
P1.02/1.6C: C29.2 R7.1 SW_DN.2
P1.02/2.8C: U1.P$W24
P1.03: U1.P$V23
P1.04: U1.P$U24
P1.05: U1.P$T23
P1.06: U1.P$R24
P1.07: U1.P$P23
P1.09: U1.P$L24 U1.P$R1
P1.10: U1.P$A20
P1.11: U1.P$B19
P1.12: U1.P$B17
P1.13: U1.P$A16
P1.14: U1.P$B15
P1.15: U1.P$A14
PMIC_INT: IC1.A1 U1.P$T2
PREVGH: D5.1 EPD_C9.2 J2.21
PREVGL: D2.2 EPD_C11.2 J2.23
RESE: J2.3 Q3.2 R1_EP_DR.2
RESET: J1.6 TP_RESET.TP U1.P$AC13
RF: ANT1.1 C4.1 C22.1 L1.2
SCK/1.5B: J2.13
SCK/2.2D: U1.P$A12
SCL/1.4C: IC2.C1 U3.7
SCL/2.4C: IC1.B1 IC3.12 R4.1 R17.2 TP_SCL.TP U1.P$M2
SDA/1.4C: IC2.B2 U3.8
SDA/2.4C: IC1.C1 IC3.2 R2.1 R18.2 TP_SDA.TP U1.P$L1
SWDCLK: J1.4 TP_SWDCLK.TP U1.P$AA24
SWDIO: J1.2 TP_SWDIO.TP U1.P$AC24
SWO: TP_SWO.TP U1.P$AD22
VBAT/1.2A [power]: C27.2 TP1.TP U3.2 U3.3
VBAT/2.5C [power]: C37.2 IC1.C2
VBUS/1.5D [power]: D1.5 J4.A4_B9 J4.A9_B4
VBUS/2.6D [power]: C21.1 C38.1 IC1.A2 U1.P$AD2
VREG [power]: C23.1 C24.2 C39.1 IC1.B2 IC9.A1 IC9.A2 IC9.A3 TP_VREG.TP

## Tracks (layer width: path | path; a pad name or v marks a point on that pad's centre or on a via)
3V3/1.7D  (via drill 0.15)
  Top 0.3: v26.09,25.63 25.6,25.15 R_PWR_EPD.2 | v24.91,26.05 24.35,26.05 24.15,25.84 DMG2305UX-7.2 | C34.2 14.94,4.86 19.99,4.86 21.59,6.45 R8.2 21.93,6.45 v22.97,6.45 | v30.31,6.73 30.1,6.94 30.03,6.94 IC2.C2 | v12.17,5.34 11.75,5.34 R5.2 | v27.33,14.83 27.33,15.32 R7.2
  Route15 0.3: v26.09,25.63 26.09,23.56 27.33,22.31 v27.33,14.83
  Bottom 0.3: v26.09,25.63 25.32,25.63 v24.91,26.05 | v30.31,6.73 29.9,6.73 29.62,6.45 26.78,6.45 | 26.78,6.45 v22.97,6.45 22.83,6.38 21.79,5.34 v12.17,5.34 | v27.33,14.83 27.33,9.78 26.78,9.22 26.78,6.45
3V3/2.4A  (via drill 0.15)
  Top 0.3: C6.1 10.51,29.44 14.18,29.44 15.7,27.92 15.91,27.92 TP_3V3.TP 15.98,27.71 16.88,26.81 16.88,26.4 C25.1 17.01,26.26 17.01,25.91 17.29,25.63 C33.1 17.43,25.57 v17.98,25.01 | v37.86,14.69 37.65,14.9 37.65,14.97 U1.P$AD14 | U1.P$AD23 40.07,14.97 v40.07,14.62 40.21,14.55 41.67,13.1 41.93,13.1 TP_3.3V.TP | C8.1 v45.14,12.04 | 34.12,16.49 34.4,16.22 34.54,16.22 U1.P$Y2 | 34.12,16.49 U1.P$W1 | 34.12,16.49 33.98,16.56 32.46,16.56 31.83,17.19 26.85,17.19 26.5,17.53 26.5,17.74 IC3.3 26.5,17.88 v26.5,18.78 | 25.32,21.48 25.46,21.34 25.46,19.33 IC3.10 | 25.32,21.48 C7.1 | C19.1 24.08,21.83 24.43,21.83 v24.56,21.69 24.7,21.55 25.19,21.55 25.32,21.48 | 17.08,20.79 17.36,20.79 IC9.E3 | 17.08,20.79 IC9.E2 | 17.08,20.79 17.08,19.4 16.95,19.26 16.95,19.06 R18.1 16.88,18.92 16.88,18.43 17.08,18.23 17.08,17.88 | 17.08,17.88 17.08,17.67 R17.1 | v34.05,21.41 34.05,21.06 U1.P$B1 | v32.32,19.68 31.97,19.68 31.49,19.2 27.4,19.2 27.33,19.26 27.19,19.26 | 27.19,19.26 27.06,19.26 IC3.7 | v39.24,21.13 39.59,21.48 U1.P$A22 | 27.19,19.26 27.19,23.07 C12.1 | v25.67,23.14 25.12,23.14 C14.1 | v36.27,29.44 36.47,29.65 36.47,30.07 J1.1 | v17.64,17.88 17.08,17.88
  Route15 0.3: v39.24,21.13 35.37,21.13 35.02,20.79 34.6,20.79 34.05,21.34 v34.05,21.41
  Bottom 0.3: v45.14,12.04 45.12,12.06 42.71,12.06 40.21,14.55 v40.07,14.62 40.01,14.69 v37.86,14.69 37.72,14.76 35.02,14.76 33.08,16.7 26.99,16.7 25.53,18.16 25.53,18.43 25.88,18.78 v26.5,18.78 28.58,20.86 | v32.32,19.68 32.63,19.99 | 32.63,19.99 v34.05,21.41 33.98,21.55 33.08,22.45 33.08,22.93 36.2,26.05 36.2,27.3 36.27,27.37 v36.27,29.44 | 28.58,20.86 30.17,19.26 30.45,19.26 30.87,19.68 30.87,20.09 31.56,20.79 31.83,20.79 32.63,19.99 | 28.58,20.86 26.29,23.14 v25.67,23.14 25.53,23.07 24.35,21.9 | 17.98,17.88 20.34,17.88 24.35,21.9 | 17.98,17.88 v17.64,17.88 | 24.35,21.9 v24.56,21.69 | 17.98,17.88 v17.98,25.01
DEC1
  Top 0.15: U1.P$C1 34.05,20.58 33.98,20.58 33.63,20.93 33.63,22.1 35.85,24.32 C5.1
DEC3
  Top 0.15: U1.P$D23 40.14,20.3 40.42,20.3 40.49,20.37 41.25,20.37 41.32,20.3 41.67,20.3 42.01,19.96 C11.1
DEC4_6  (via drill 0.15)
  Top 0.15: v41.54,19.89 41.4,20.03 40.63,20.03 U1.P$E24 | v41.54,20.72 42.01,20.72 C10.1 | C15.1 44.71,18.16 44.51,18.36 44.51,19.4 C16.1 44.44,19.47 44.44,20.09 42.91,21.62 42.91,21.96 | v35.3,21.9 35.3,21.06 U1.P$B5 | v34.33,23.35 34.33,23.77 34.4,23.84 L3.2 34.47,23.9 35.57,25.01 42.57,25.01 42.91,24.67 42.91,21.96 | v42.78,21.96 42.91,21.96
  Bottom 0.15: v41.54,19.89 v41.54,20.72 v41.53,20.72 v42.78,21.96 | v35.3,21.9 35.3,22.38 v34.33,23.35
DN  (via drill 0.15)
  Top 0.15: 23.39,28.06 23.18,27.85 23.18,27.3 J4.A7 | 23.39,28.06 23.87,28.06 24.08,27.85 24.08,27.3 J4.B7 | v22.14,30.41 19.37,33.18 18.75,33.18 17.71,32.14 17.22,32.14 D1.1 | v23.32,28.2 23.39,28.13 23.39,28.06
  Bottom 0.15: v22.14,30.41 22.14,29.37 v23.32,28.2
DP  (via drill 0.15)
  Top 0.15: 22.69,26.67 22.69,27.23 J4.B6 | 22.69,26.67 22.9,26.47 23.39,26.47 23.59,26.67 23.59,27.23 J4.A6 | v15.35,30.62 15.35,32.08 D1.3 | v22,26.4 22.35,26.4 22.62,26.67 22.69,26.67
  Bottom 0.15: v15.35,30.62 15.35,29.93 18.88,26.4 v22,26.4
EPD_3V3  (via drill 0.15)
  Top 0.3: 12.41,18.47 11.4,17.46 11.4,16.49 11.2,16.29 10.78,16.29 J2.15 10.78,16.15 10.78,15.8 J2.16 | 12.41,18.47 12.51,18.57 12.72,18.57 EPD_C5.2 | 19.65,25.22 21.72,25.22 22,24.94 DMG2305UX-7.3 | 19.65,25.22 19.09,25.22 C1-EP-DR.1 | v18.61,18.36 18.61,18.16 20.48,16.29 21.45,16.29 L5.2 | v19.65,25.08 19.65,25.22 | v12.24,18.64 12.41,18.47
  Bottom 0.3: v18.61,18.36 19.65,19.4 v19.65,25.08 19.51,25.15 19.16,25.5 17.85,25.5 17.5,25.15 17.5,24.25 12.24,18.99 v12.24,18.64
GND  (via drill 0.15)
  Top 0.3: 26.43,4.72 26.71,4.72 26.85,4.86 C32.1 26.99,4.86 27.4,4.86 27.96,5.41 28.86,5.41 29.38,4.89 | 26.43,4.72 26.23,4.72 C27.1 26.09,4.72 24.56,4.72 24.43,4.65 | 24.43,4.65 23.94,5.14 C31.1 23.94,5.28 23.94,6.11 23.11,6.94 12.65,6.94 | 24.43,4.65 24.43,4.17 SW_ENT.1 | 29.93,5.45 30.38,5 U3.4 | 29.93,5.45 29.48,5.9 29.48,6.45 IC2.B1 | U3.1 30.38,3.48 29.96,3.48 29.41,4.03 29.41,4.17 U3.9 | U3.6 28.44,4.44 29.06,4.44 29.27,4.24 U3.9 | 29.38,4.89 29.06,4.58 U3.9 | 29.38,4.89 29.93,5.45 | C20.2 32.66,15.32 31.07,15.32 30.79,15.59 X1.2 30.73,15.73 30.38,16.08 30.38,16.15 29.83,16.7 27.96,16.7 26.85,15.59 26.85,11.78 | 29.41,7.98 29.41,10.68 28.86,11.23 TP2.TP | 29.41,7.98 29.41,7.49 IC2.B3 | X1.4 29.55,14.14 29.55,12.13 28.86,11.44 TP2.TP | 26.85,11.78 28.44,11.78 28.72,11.51 TP2.TP | 26.85,11.78 25.95,11.78 D4.1 | 26.43,4.72 26.43,6.04 28.37,7.98 29.41,7.98 | 11.27,10.05 11.89,10.68 12.37,10.68 EPD_C11.1 | 11.27,10.05 10.3,10.05 9.95,10.4 EPD_C12.1 9.81,10.61 9.81,10.47 8.36,9.02 EPD_C10.1 8.22,9.08 7.73,9.57 | 7.73,9.57 7.73,10.33 8.08,10.68 8.08,10.95 J2.MP2 8.15,11.09 8.15,13.1 10.23,15.18 10.3,15.32 | 12.65,6.94 12.65,8.6 11.34,9.91 11.27,10.05 | 12.65,6.94 12.65,6.45 C30.1 12.65,6.31 12.65,5.48 13.41,4.72 13.41,4.31 SW_UP.1 14.74,4.27 C34.1 | TP_GND.TP 6,8.67 6.77,8.67 7.6,9.5 7.73,9.57 | 10.3,15.32 10.71,15.32 J2.17 | 10.3,15.32 10.09,15.52 10.09,19.54 10.3,19.75 | 10.3,19.75 10.71,19.75 J2.8 10.85,19.75 11.89,19.75 12.44,19.2 EPD_C1.1 12.58,19.12 13,19.12 | 10.3,19.75 10.23,19.89 8.15,21.96 8.15,24.04 J2.MP1 8.22,24.18 8.22,28.2 10.44,30.41 C6.2 10.51,30.55 10.85,30.55 12.65,32.35 C43.2 12.79,32.42 14.05,32.42
  Top 0.3: 13.14,14.14 13.48,13.79 13.48,13.45 12.44,12.41 EPD_C9.1 | 13.14,14.14 12.44,14.14 EPD_C7.1 | 13.07,18.09 12.79,18.09 EPD_C5.1 | 13.07,18.09 13.27,18.3 13.27,18.85 13,19.12 | 13.21,16.49 13.76,16.49 13.9,16.36 EPD_C6.1 14.04,16.42 14.52,16.91 15.28,16.91 15.49,16.7 15.49,15.94 14.8,15.25 13.97,15.25 13.14,14.42 13.14,14.14 | 13.21,16.49 12.58,16.49 EPD_C8.1 | 13.21,16.49 13.21,17.88 13.14,17.95 13.07,18.09 | 16.12,25.84 16.04,25.91 16.04,26.26 C25.2 | 16.12,25.84 17.29,24.67 C33.2 17.31,23.49 C38.2 | 15.32,21.17 14.52,20.37 R9.1 14.38,20.44 14.04,20.79 13.21,20.79 | 15.32,21.17 15.77,21.62 16.6,21.62 IC9.C1 | 13.21,20.79 12.58,20.79 EPD_C2.1 | 15.32,21.17 14.18,22.31 C39.2 14.24,22.45 15.35,23.56 15.35,24.11 C24.1 15.42,24.25 15.42,25.15 15.61,25.33 | 15.61,25.33 16.12,25.84 | 13.21,20.79 13.21,19.82 13.07,19.68 13.07,19.26 13,19.12 | 36.2,7.7 36.2,4.93 36.02,4.76 | 36.2,7.7 C1.2 | 36.02,4.76 35.51,4.24 SW_DN.1 35.45,4.95 C29.1 | 36.02,4.76 37.86,2.92 38.2,2.92 SJ1.1 | 41.74,7.28 41.74,6.66 R_TYPE_SEL.1 | 40.94,8.08 40.84,8.18 C17.1 40.84,8.39 40.84,8.46 39.73,9.57 39.73,10.26 C18.1 | 40.94,8.08 41.74,7.28 | 41.74,7.28 41.87,7.35 42.64,7.35 43.95,8.67 C21.2 44.09,8.81 44.76,9.47 44.76,10.48 43.76,11.48 v43.76,12.55 44.33,12.55 44.64,12.86 C8.2 | 36.2,7.7 40.56,7.7 40.94,8.08 | 38.34,23.77 37.79,24.32 36.4,24.32 C5.2 36.34,24.18 36.34,22.31 35.71,21.69 35.71,21.2 35.78,21.13 35.78,20.99 | 38.34,23.77 38.34,23.49 C4.2 | C22.2 40.21,23.49 40.21,23.84 40.01,24.04 38.69,24.04 38.48,23.84 38.34,23.77 | 39.18,20.03 39.38,19.82 40.07,19.82 U1.P$F23 | 35.78,20.99 35.78,20.3 35.57,20.09 U1.P$74 39.18,20.03
  Top 0.3: 35.78,20.99 U1.P$B7 | 29.06,21.27 29.27,21.27 29.34,21.2 30.66,21.2 IC1.D2 | 29.06,21.27 C37.1 | 27.26,23.84 26.57,23.84 | 27.26,23.84 27.68,23.42 27.68,23.14 C12.2 27.82,23 28.99,21.83 28.99,21.41 29.06,21.27 | 26.57,23.84 R1_USB.1 | R3.1 22.28,22.38 24.01,22.38 C19.2 24.22,22.38 24.7,22.38 24.91,22.17 C14.2 25.12,22.1 25.53,22.1 | IC3.8 26.43,19.33 26.02,19.33 IC3.9 25.95,19.47 25.95,21.41 C7.2 25.88,21.55 25.88,21.76 25.53,22.1 | 26.57,23.84 26.5,23.7 26.5,23.14 25.6,22.24 25.53,22.1 | 42.57,18.43 42.57,19.12 C3.2 42.57,19.26 42.57,19.47 | 42.57,18.43 C9.2 | 42.57,19.47 42.57,19.89 C11.2 42.57,20.03 42.57,20.65 C10.2 42.57,20.79 42.57,21.41 C2.2 | 42.57,19.47 43.82,19.47 | 43.82,19.47 43.95,19.47 C16.2 | 43.82,19.47 43.82,18.16 C15.2 | 20.2,26.74 20.75,26.19 20.96,26.19 R2_USB.2 | 20.2,26.74 20.2,27.23 J4.A12_B1 20.06,27.37 19.51,27.37 19.09,27.78 J4.SH4 | C1-EP-DR.2 19.09,26.33 19.72,26.33 20.06,26.67 20.2,26.74 | 26.88,26.98 26.64,27.23 J4.A1_B12 | 26.88,26.98 27.06,26.81 27.06,26.19 R2_EP_DR.1 27.19,26.19 27.54,25.84 27.54,25.36 27.33,25.15 27.33,23.97 27.26,23.84 | J1.3 35.23,30.07 33.98,30.07 J1.5 33.84,30 33.5,30 33.08,29.58 30.1,29.58 27.75,31.94 J4.SH1 | v38.55,22.1 38.2,22.45 38.14,22.45 C13.2 | J4.SH2 19.02,31.94 18.26,31.17 16.81,31.17 16.32,31.66 16.32,32.08 D1.2 16.18,32.21 16.18,32.56 15.7,33.05 14.94,33.05 14.31,32.42 14.05,32.42 | 26.88,26.98 27.68,27.78 J4.SH3 | v42.98,18.36 42.71,18.36 42.57,18.43 | 39.18,20.03 U1.P$78 | 15.61,25.33 15.98,24.96 C23.2 | IC9.C3 IC9.C2 IC9.C1 | IC9.C1 IC9.B1 | 14.05,32.42 14.36,32.12 14.36,31.55 C42.2
  Bottom 0.3: v38.55,22.1 38.55,20.65 38,20.09 U1.P$77 | v42.98,18.36 42.64,18.36 40.77,16.49 | 40.77,16.49 39.18,16.49 U1.P$90 | v43.76,12.55 43.76,13.43 40.84,16.36 40.77,16.49
  pour Route2: -1.97,-1.66 51.14,-1.66 51.14,36.71 51.14,36.72 -1.97,36.72
IMU_INT1  (via drill 0.15)
  Top 0.15: v31,18.36 33.29,18.36 33.57,18.09 34.05,18.09 U1.P$N1 | v29.69,18.36 27.06,18.36 IC3.5
  Bottom 0.15: v29.69,18.36 v31,18.36
IMU_INT2
  Top 0.15: U1.P$P2 33.48,17.78 33.46,17.79 33.43,17.81 33.29,17.95 30.87,17.95 30.03,18.78 27.06,18.78 IC3.6
LX1
  Top 0.15: IC9.B2 17.08,21.96 17.36,21.96 IC9.B3 17.5,21.96 19.44,21.96 20.06,22.59 L7.1
LX2
  Top 0.15: IC9.D2 17.08,21.2 17.36,21.2 IC9.D3 17.43,21.2 19.44,21.2 20.06,20.58 L7.2
N$1
  Top 0.15: IC9.D1 16.6,21.13 16.53,21.13 15.08,19.68 15.08,18.85 R4.2
N$2
  Top 0.15: IC3.1 25.46,17.81 24.84,17.81 22.28,20.37 22.28,21.83 R3.2
N$3  (via drill 0.15)
  Top 0.15: IC9.E1 16.6,20.72 v16.6,20.37 16.6,19.96 15.7,19.06 R2.2 | v21.79,23.14 23.25,24.6 24.63,24.6 24.7,24.53 25.81,24.53 26.85,25.57 27.06,25.57 R2_EP_DR.2 | v22.97,9.71 22.97,9.15 Q3.1
  Route2 0.15: v21.79,23.14 20.41,21.76 17.98,21.76 v16.6,20.37
  Bottom 0.15: v22.97,9.71 22.97,11.23 15.91,18.3 15.91,19.68 v16.6,20.37
N$4
  Top 0.15: 20.23,10.43 20.89,9.78 Q3.3 | 20.23,10.43 19.92,10.75 19.23,10.75 C2-EP-DR.2 19.16,10.82 18.05,11.92 18.05,14.28 D5.2 | 20.23,10.43 21.45,11.65 L5.1
N$5  (via drill 0.15)
  Top 0.15: v27.96,24.6 31.07,21.48 31.07,21.2 IC1.D1 | v14.8,31.04 14.8,31.02 14.64,30.86 14.15,30.86 13.83,31.17 13.83,31.31 C42.1 13.76,31.38 12.72,31.38 C43.1 | v15.42,14.35 15.91,14.83 15.91,16.84 15.42,17.32 15.28,17.32 14.11,18.5 14.11,19.06 14.45,19.4 14.45,19.75 R9.2
  Bottom 0.15: v27.96,24.6 27.96,25.43 22.55,30.83 17.91,30.83 17.71,31.04 v14.8,31.04 14.8,30.97 10.99,27.16 10.99,18.92 15.42,14.49 v15.42,14.35
N$6
  Top 0.15: D2.1 17.91,10.75 18.88,9.78 19.16,9.78 C2-EP-DR.1 19.23,9.71 19.65,9.29 21.52,9.29 21.72,9.5 21.72,10.19 22.42,10.88 24.15,10.88 24.35,11.09 24.35,11.58 25.88,13.1 25.88,15.32 D4.2
N$7  (via drill 0.15)
  Top 0.15: v27.26,9.08 26.57,9.08 R1_EP_DR.1 | v36.68,5.97 38.2,4.44 SJ1.2 38.27,4.44 39.87,6.04 41.74,6.04 R_TYPE_SEL.2
  Bottom 0.15: v27.26,9.08 33.57,9.08 v36.68,5.97
N$8
  Top 0.15: C32.2 26.92,5.28 27.26,5.28 28.93,6.94 IC2.A2
N$9  (via drill 0.15)
  Top 0.15: v26.71,24.8 26.57,24.67 26.57,24.46 R1_USB.2 | v24.7,28.13 24.7,27.37 24.63,27.3 J4.A5
  Bottom 0.15: v26.71,24.8 26.71,26.12 v24.7,28.13
N$10
  Top 0.15: EPD_C2.2 12.51,21.83 10.78,21.83 J2.4
N$11
  Top 0.15: EPD_C1.2 12.51,20.23 12.1,20.23 11.13,21.2 10.78,21.2 J2.5
N$14
  Top 0.15: R2_USB.1 21.03,25.63 21.59,26.19 21.59,27.23 J4.B5
N$17
  Top 0.15: U1.P$AC5 35.3,15.52 34.81,15.52 34.74,15.45 33.84,15.45 32.73,14.35 C20.1
N$19
  Top 0.15: EPD_C6.2 14.87,16.29 14.73,16.29 14.11,15.66 11.96,15.66 11.13,14.83 10.78,14.83 J2.18
N$21
  Top 0.15: EPD_C7.2 12.37,15.11 11.89,15.11 11.06,14.28 10.78,14.28 J2.19
N$22  (via drill 0.15)
  Top 0.15: v12.03,16.98 12.51,17.46 EPD_C8.2 | v11.75,14.42 11.13,13.79 10.78,13.79 J2.20
  Bottom 0.15: v12.03,16.98 12.03,14.69 v11.75,14.42
N$24
  Top 0.15: EPD_C10.2 8.36,10.05 8.36,10.26 10.16,12.06 10.16,12.48 10.44,12.75 10.71,12.75 J2.22
N$26
  Top 0.15: EPD_C12.2 10.85,10.68 10.85,11.65 10.78,11.72 J2.24
N$46
  Top 0.15: U1.P$N24 40.63,18.09 41.74,18.09 42.01,18.36 C9.1
N$49  (via drill 0.15)
  Top 0.15: U1.P$H23 40.14,19.33 v41.04,19.33 41.87,19.33 42.01,19.2 C3.1 | v41.04,21.96 40.56,22.45 L1.1
  Route2 0.15: v41.04,19.33 v41.04,21.96
N$51  (via drill 0.15)
  Top 0.15: C2.1 42.01,21.48 40.14,21.48 U1.P$A23 40.14,21.55 39.73,21.96 39.52,21.96 39.45,21.9 v39.31,21.9 | v28.93,16.22 28.99,16.22 29.55,15.66 X1.3
  Route2 0.15: v28.93,16.22 29.55,16.22 32.94,19.61 32.94,20.37 33.5,20.93 38.34,20.93 v39.31,21.9
N$52  (via drill 0.15)
  Top 0.15: v35.64,8.67 35.64,8.18 C1.1 | v33.5,10.82 33.5,11.44 30.79,14.14 X1.1 30.76,12.75 v30.77,12.74
  Route15 0.15: v30.77,12.74 37.98,12.74 39.86,10.86 45.04,10.86 45.63,11.44 45.63,20.46 44.2,21.88 43.54,21.88 43.16,22.27 43.16,22.65 v42.3,22.65
  Bottom 0.15: v33.5,10.82 v35.64,8.67 | v42.3,22.65 41.51,21.86 41.51,21.3 41.23,21.02 U1.P$B24
  other vias: 40.6,21.03
N$58
  Top 0.15: U1.P$A18 38.55,21.55 38.07,22.03 37.86,22.03 37.65,22.24 37.65,22.45 C13.1
N$69  (via drill 0.15)
  Top 0.15: v34.81,21.41 34.81,21.06 U1.P$B3 | v33.57,22.66 33.57,22.8 32.46,23.9 L2.1
  Bottom 0.15: v33.57,22.66 v34.81,21.41
N$70
  Top 0.15: L3.1 34.4,24.94 32.46,24.94 L2.2
OUT+  (via drill 0.15)
  Top 0.15: v28.51,7.49 28.93,7.49 IC2.A3 | v31.42,8.67 TP_OP.TP
  Bottom 0.15: v28.51,7.49 30.24,7.49 v31.42,8.67
OUT-
  Top 0.15: IC2.C3 30.03,7.49 33.15,7.49 33.36,7.7 TP_ON.TP
P0.00/XL1  (via drill 0.15)
  Top 0.15: v33.43,20.16 34.19,20.16 34.26,20.23 34.54,20.23 U1.P$D2 | v33.57,14.62 33.57,12.96 34.67,11.85 34.67,11.09 X2.2 34.74,11.02 37.51,8.25 40.28,8.25 C17.2
  Route2 0.15: v33.43,20.16 33.43,14.76 v33.57,14.62
P0.01/XL2
  Top 0.15: U1.P$F2 34.54,19.82 34.26,19.82 34.19,19.89 33.7,19.89 33.57,19.75 33.29,19.75 31.7,21.34 31.7,21.69 28.79,24.6 28.79,29.44 26.85,31.38 26.85,32.63 27.75,33.53 35.23,33.53 36.27,32.49 36.27,31.38 37.37,30.27 38.14,30.27 43.19,25.22 43.19,21.76 45.41,19.54 45.41,14.7 41.04,10.33 40.21,10.33 C18.2 40.21,10.4 39.59,11.02 37.24,11.02 X2.1
P0.13/1.5D
  Top 0.15: C30.2 12.17,6.31 11.54,5.69 11.48,5.69 11.13,5.34 R5.1 11.13,5.28 11.13,4.72 10.71,4.31 SW_UP.2
P0.14/1.5D
  Top 0.15: 22.45,5.31 21.86,5.9 R8.1 | 22.45,5.31 22.55,5.21 23.52,5.21 C31.2 | 22.45,5.31 21.72,4.58 21.72,4.17 SW_ENT.2
P1.01/1.6C  (via drill 0.15)
  Top 0.15: v24.91,24.94 24.91,25.5 25.53,26.12 R_PWR_EPD.1 | v24.43,23.14 24.43,23.63 24.15,23.9 DMG2305UX-7.1
  Route2 0.15: v24.91,24.94 24.91,23.63 v24.43,23.14
P1.02/1.6C
  Top 0.15: SW_DN.2 32.66,4.24 32.66,4.58 33.22,5.14 33.29,5.14 34.05,5.9 C29.2 34.12,5.97 34.12,6.11 34.67,6.66 34.67,8.18 33.98,8.88 33.98,12.13 31.28,14.83 29.13,14.83 28.65,15.32 27.89,15.32 R7.1
P1.09  (via drill 0.15)
  Top 0.15: v32.11,17.53 32.18,17.46 34.05,17.46 U1.P$R1 | v40.21,18.85 40.56,18.5 U1.P$L24
  Bottom 0.15: v32.11,17.53 37.1,22.52 39.24,22.52 39.96,21.8 39.96,19.1 v40.21,18.85
PMIC_INT  (via drill 0.15)
  Top 0.15: U1.P$T2 v34.6,16.73 | v31.35,19.68 31.28,19.68 31.07,19.89 IC1.A1
  Route15 0.15: v34.6,16.73 34.3,16.73 v31.35,19.68 | v31.35,19.68 31.07,19.95 | v31.35,19.68
PREVGH  (via drill 0.15)
  Top 0.15: J2.21 10.78,13.31 12.37,13.31 EPD_C9.2 12.44,13.38 12.72,13.66 v13,13.66 | v13.62,14.28 14.45,14.28 D5.1
  Bottom 0.15: v13,13.66 v13.62,14.28
PREVGL
  Top 0.15: J2.23 10.78,12.2 11.13,12.2 11.61,11.72 12.37,11.72 EPD_C11.2 12.44,11.65 13.27,10.82 14.38,10.82 D2.2
RESE  (via drill 0.15)
  Top 0.15: R1_EP_DR.2 26.5,9.71 23.73,9.71 23.04,10.4 Q3.2 22.97,10.4 22.69,10.12 v22.21,10.12 | v11.4,22.24 10.78,22.24 J2.3
  Bottom 0.15: v11.4,22.24 11.4,18.92 20.2,10.12 v22.21,10.12
RESET  (via drill 0.15)
  Top 0.15: J1.6 33.98,28.41 31.9,26.33 v31.9,22.03 | v32.32,11.3 31,11.3 TP_RESET.TP
  Route15 0.15: U1.P$AC13 36.08,14.26 | 36.08,14.26 35.16,13.34 v35.16,13.3 | v31.9,22.03 31.9,21.2 30.79,20.09 30.79,19.54 36.08,14.26
  Bottom 0.15: v32.32,11.3 33.22,11.3 35.16,13.24 v35.16,13.3
  other vias: 37.35,15.53
RF
  Top 0.15: 39.14,22.83 39.45,22.52 L1.2 | 39.14,22.83 39.04,22.93 38.2,22.93 37.86,23.28 37.86,23.42 C4.1 | 39.14,22.83 39.73,23.42 C22.1 39.73,23.35 40.07,23 41.04,23 41.87,23.84 ANT1.1
SCL/1.4C  (via drill 0.15)
  Top 0.15: v29.96,6.04 29.96,6.45 IC2.C1 | v27.75,4.31 28.09,3.96 28.37,3.96 U3.7
  Bottom 0.15: v29.96,6.04 29.48,6.04 v27.75,4.31
SCL/2.4C  (via drill 0.15)
  Top 0.15: R4.1 14.52,18.78 14.52,18.64 16.04,17.12 17.08,17.12 R17.2 17.22,17.12 v17.64,17.12 | v31.7,20.3 31.07,20.3 IC1.B1 | v26.02,18.3 25.53,18.3 IC3.12 25.39,18.3 25.32,18.23 v24.98,18.23 | v14.11,21.48 10.85,24.73 10.85,26.88 TP_SCL.TP
  Route15 0.15: U1.P$M2 33.56,18.28 33.21,18.63 | v14.11,21.48 16.88,18.71 16.88,17.88 v17.64,17.12
  Bottom 0.15: v31.7,20.3 31.7,19.89 31.76,19.82 31.76,17.95 | 31.76,17.95 31.76,17.74 31.7,17.67 31.7,17.39 31.97,17.12 33.43,17.12 34.54,18.23 U1.P$M2 | v26.02,18.3 29.2,18.3 29.55,17.95 31.76,17.95 | v17.64,17.12 23.87,17.12 v24.98,18.23
  other vias: 34.6,18.28
SDA/1.4C  (via drill 0.15)
  Top 0.15: v28.37,2.99 28.37,3.41 U3.8
  Route15 0.15: IC2.B2 29.47,2.4 29.29,2.22 29.04,2.22 28.35,2.91 28.35,2.99 | 28.35,2.99 28.35,3.44 28.38,3.47 | v28.37,2.99 28.35,2.99
  other vias: 29.47,6.97
SDA/2.4C  (via drill 0.15)
  Top 0.15: 31.42,20.72 31.07,20.72 IC1.C1 | 31.42,20.72 31.9,20.72 34.05,18.57 U1.P$L1 | v16.32,18.57 16.32,18.99 R2.1 | 17.36,18.78 17.36,18.99 R18.2 | 17.36,18.78 v17.36,18.57 | IC3.2 25.95,17.74 25.95,17.6 25.74,17.39 21.24,17.39 19.85,18.78 TP_SDA.TP | 17.36,18.78 19.79,18.78 TP_SDA.TP | 31.42,20.72 31.42,21.55 28.51,24.46 28.51,28.68 27.4,29.79 18.68,29.79 18.26,29.37 18.26,25.29 18.54,25.01 18.54,24.94 18.95,24.53 20.48,24.53 21.38,23.63 21.38,19.82 20.13,18.57 TP_SDA.TP
  Bottom 0.15: v17.36,18.57 v16.32,18.57
SWDCLK  (via drill 0.15)
  Top 0.15: 40.91,16.08 42.08,16.08 42.57,16.56 TP_SWDCLK.TP | 40.91,16.08 40.63,16.08 U1.P$AA24 | v36.47,25.7 36.27,25.91 36.27,27.43 35.3,28.41 35.3,28.75 J1.4 | 40.91,16.08 v40.91,17.26
  Bottom 0.15: v36.47,25.7 40.24,21.94 40.24,19.47 40.85,18.86 40.85,18.47 40.27,17.89 v40.91,17.26
SWDIO  (via drill 0.15)
  Top 0.15: U1.P$AC24 40.63,15.52 42.08,15.52 42.78,14.83 43.53,14.83 TP_SWDIO.TP 43.92,15.24 v43.92,16.94 | v37.17,28.61 37.03,28.75 36.54,28.75 J1.2
  Bottom 0.15: v37.17,28.61 38.27,28.61 43.19,23.7 43.19,18.71 43.92,17.98 v43.92,16.94
SWO
  Top 0.15: U1.P$AD22 39.66,14.97 39.66,13.03 40.3,12.39 TP_SWO.TP
VBAT/1.2A
  Top 0.3: U3.3 30.38,4.44 U3.2 30.52,3.96 30.79,3.96 31.07,3.68 31.07,3.2 29.2,1.33 26.85,1.33 TP1.TP 26.81,3.72 C27.2
VBAT/2.5C
  Top 0.15: IC1.C2 29.14,20.74 C37.2
VBUS/1.5D  (via drill 0.15)
  Top 0.3: 21.55,28.37 21.86,28.68 24.84,28.68 25.74,27.78 25.74,27.3 J4.A4_B9 | 21.55,28.37 21.03,27.85 21.03,27.3 J4.A9_B4 | v16.74,30.48 16.32,30.07 16.32,29.65 D1.5 | v18.82,29.37 20.55,29.37 21.55,28.37
  Bottom 0.3: v16.74,30.48 17.71,30.48 v18.82,29.37
VBUS/2.6D  (via drill 0.15)
  Top 0.3: v30.31,19.75 30.45,19.89 30.66,19.89 IC1.A2 | v20.34,24.11 18.33,24.11 17.71,23.49 C38.1 | v34.12,15.04 34.54,15.04 U1.P$AD2 | v42.5,8.81 43.05,8.81 C21.1
  Route15 0.3: v34.12,15.04 32.25,16.91 31.63,16.91 30.31,18.23 v30.31,19.75
  Bottom 0.3: v30.31,19.75 30.31,23.84 30.38,23.9 30.38,24.18 30.03,24.53 28.51,24.53 28.09,24.11 v20.34,24.11 | v42.5,8.81 40.35,8.81 v34.12,15.04
VREG  (via drill 0.15)
  Top 0.15: IC1.B2 v29.81,20.34 v29.8,20.33
  Top 0.3: C23.1 16.39,24.87 16.39,24.18 C24.2 16.39,23.97 16.39,22.38 | 17.01,22.38 16.67,22.38 IC9.A1 16.53,22.38 16.39,22.38 | 17.01,22.38 IC9.A2 | 17.01,22.38 17.36,22.38 IC9.A3 17.57,22.38 17.71,22.38 18.88,23.56 v20.82,23.56 | 16.39,22.38 15.15,22.38 C39.1 | v29.9,24.04 29.9,26.05 30.31,26.47 TP_VREG.TP
  Bottom 0.3: 29.83,23.63 29.83,23.97 v29.9,24.04 | 29.83,23.63 29.83,20.37 v29.8,20.33 | v20.82,23.56 21.59,23.56 21.65,23.63 29.83,23.63